# Altium PCB PCB - 100x100 - 85x85.PcbDoc
Units mil, origin at the board's own origin, x right, y up, seen from the top; angles counter-clockwise.
Board outline 1820 x 600 mil, 2 copper layers (Top Layer, Bottom Layer); 14 components, 12 nets, 56 pads, 0 vias.
Unrouted connection lines stored in the file: 2.
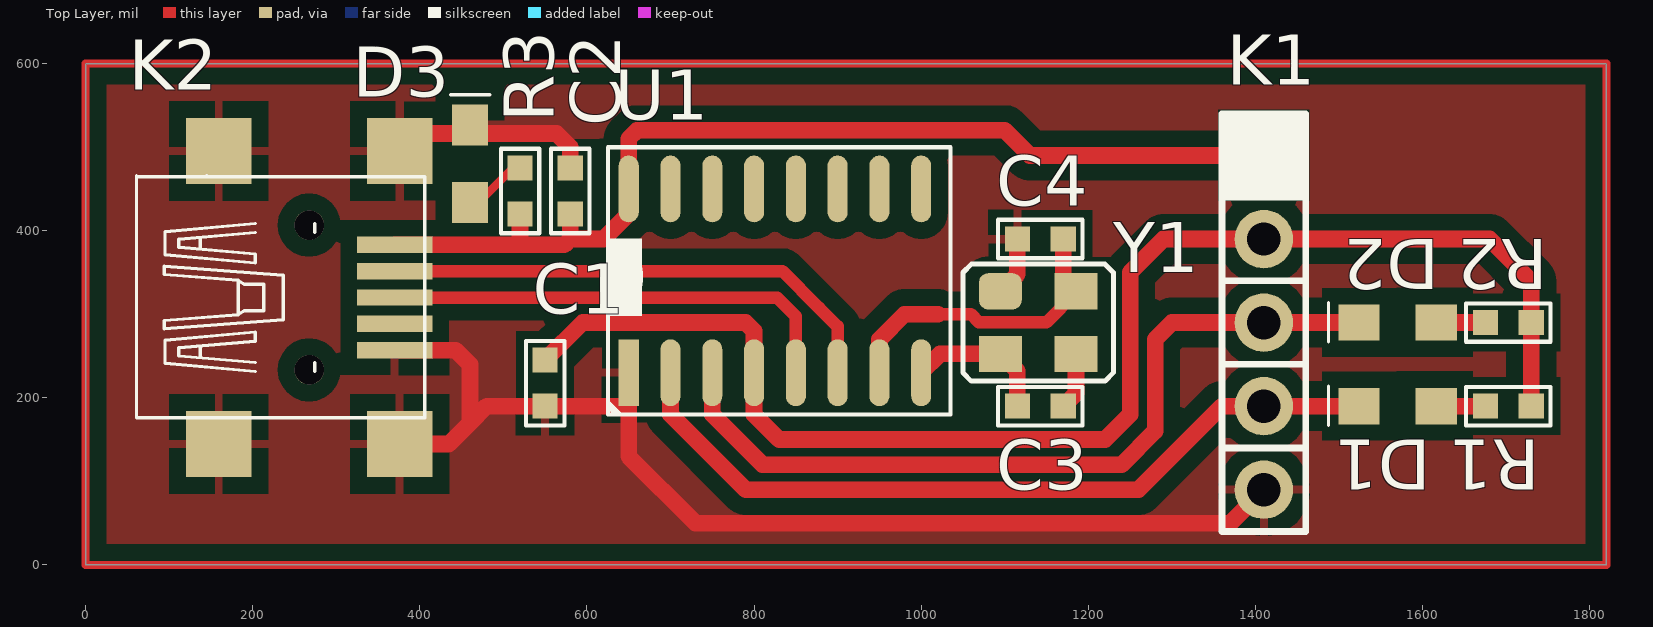
[diagram p0: Top Layer view]
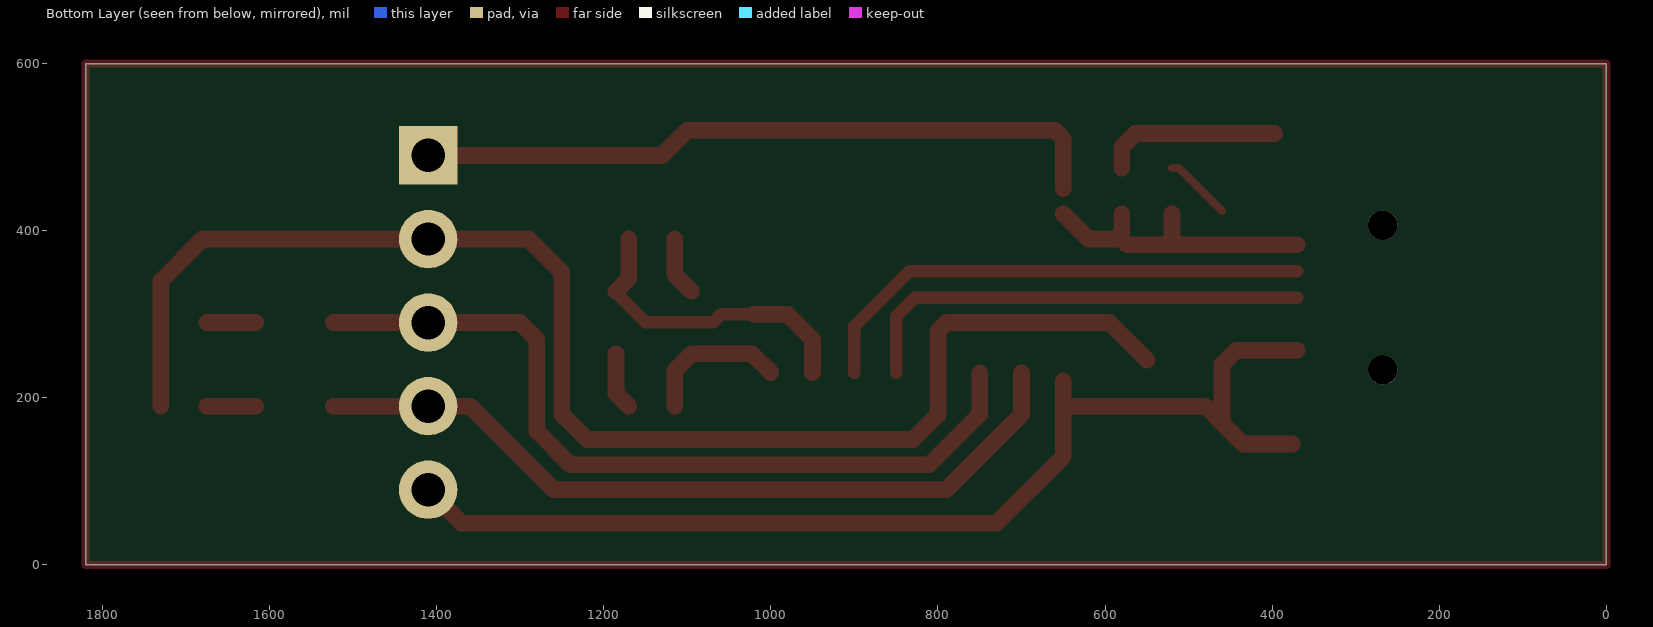
[diagram p1: Bottom Layer view, seen from below]

## Layer stack, top to bottom
Top Solder: solder mask 0.4, Solder Resist, Dk 3.5
Top Layer: signal copper 1.4
Dielectric1: dielectric 12.6, FR-4, Dk 4.8
Bottom Layer: signal copper 1.4
Bottom Solder: solder mask 0.4, Solder Resist, Dk 3.5

## Board outline
0,0 0,600 1820,600 1820,0

## Design rules (kind name [scope] priority, off if disabled: settings)
Clearance Clearance_2 [(InComponent('U2') OR InComponent('C8'))] p1: gap=6
Clearance Clearance_1 [InPolygon] p2: gap=20
Clearance [All] p3: gap=8
DiffPairsRouting [All] p1: maxlimit=10 minlimit=10 mostfreqgap=10 toplayer_minwidth=15 toplayer_maxwidth=15 toplayer_prefwidth=15 bottomlayer_minwidth=15 bottomlayer_maxwidth=15 bottomlayer_prefwidth=15 maxuncoupledlength=500
MinimumSolderMaskSliver [All] p1: minsoldermaskwidth=1
PlaneConnect [All] p1: planeconnectstyle=Relief reliefexpansion=20 reliefentries=4 reliefconductorwidth=10 reliefairgap=20
PolygonConnect [All] p1: connectstyle=Relief reliefconductorwidth=10 reliefentries=4 polygonreliefangle="90 Angle" airgapwidth=20
RoutingVias [All] p1: holewidth=28 width=50 viastyle="Through Hole" minholewidth=28 minwidth=50 maxholewidth=28 maxwidth=50
SilkToSilkClearance [All] p1: silktosilkclearance=0
SilkToSolderMaskClearance [IsPad] p1: minsilkscreentomaskgap=0 clearancetoexposedcopper=TRUE
SolderMaskExpansion [All] p1: expansion=4
Width [All] p1: maxlimit=100 minlimit=10 preferedwidth=20
25 further rules are at their usual default settings.

## Classes and differential pairs
differential pair USB: +USB_P -USB_N

## Components (designator, comment, footprint, x,y, rotation, side; value= is the part's Value field where it differs from the comment)
C1 "100nF" 0603C-GENERIC 550,190 r90 top
C2 "100nF" 0603C-GENERIC 580,475 r270 top
C3 "22pF" 0603C-GENERIC 1170,190 r180 top
C4 "22pF" 0603C-GENERIC 1170,390 r180 top
D1 "TX" 0805LED 1570,190 r180 top
D2 "RX" 0805LED 1570,290 r180 top
D3 "PWR" 0805LED 460,480 r90 top
K1 "Connector_Headers_THT_1X5" HEADER-1X5 1410,490 r0 top
K2 "Connector_USB_SMD_USB_F_MINI" USB_F_MINI 370,320 r0 top
R1 "0603R-1K5" 0603R-1k5 1730,190 r180 top
R2 "0603R-1K5" 0603R-1k5 1730,290 r180 top
R3 "0603R-1K5" 0603R-1k5 520,420 r90 top
U1 "CH340G" SO16 650,230 r90 top
Y1 "3225" "XTAL 3225" 1140,290 r0 top

## Footprints (in the part's own frame and the unit in brackets; to place one, negate y for a bottom-side part, rotate by r counter-clockwise, add the part's x,y. Pads: shape width x height; smd on the part's side, far side on the other; paste and mask are expansions set on the pad)
0603C-GENERIC [mil] "CAPACITOR 0603"
  rect 30x30 smd: 1(0,0) 2(55,0)
  silkscreen extent -23,-23 78,23, body extent -4,-15 59,15, height 19
0603R-1k5 [mil] "RESISTOR 0603"
  rect 30x30 smd: 1(0,0) 2(55,0)
  silkscreen extent -23,-23 78,23, body extent -4,-15 59,15, height 20
0805LED [mm]
  rect 1.25x1.1 smd: A(-1.175,0) K(1.175,0)
  silkscreen extent 2.1,-0.6 2.1,0.59
HEADER-1X5 [mil]
  rect 70x70 hole 40: 1(0,0)
  round 70 hole 40: 2(0,-100) 3(0,-200) 4(0,-300) 5(0,-400)
  silkscreen extent -50,-450 50,50, body extent -50,-450 50,50, height 470
SO16 [mil]
  rect 80x24 smd: 1(0,0)
  oval 80x24 smd: 2(0,-50) 3(0,-100) 4(0,-150) 5(0,-200) 6(0,-250) 7(0,-300) 8(0,-350) 9(220,-350) 10(220,-300) 11(220,-250) 12(220,-200) 13(220,-150) 14(220,-100) 15(220,-50) 16(220,0)
  silkscreen extent -50,-385 270,25, body extent -20,-385 240,25, height 61
USB_F_MINI [mm]
  round 0.9 hole 0.9 unplated: 0(-2.6,-2.2) 0(-2.6,2.2)
  rect 2.3x0.5 smd: 1(0,1.6) 2(0,0.8) 3(0,0) 4(0,-0.8) 5(0,-1.6)
  rect 2x2 smd: M1(-5.35,4.45) M2(0.15,4.45) M3(-5.35,-4.45) M4(0.15,-4.45)
  silkscreen extent -7.85,-3.65 0.91,3.7, body extent -8.35,-4.95 1.05,4.95, height 3.95
"XTAL 3225" [mm] "3225 Quartz"
  rrect50% 1.3x1.1 smd: 1(-1.15,0.95)
  rect 1.3x1.1 smd: 2(1.15,0.95) 3(1.15,-0.95) 4(-1.15,-0.95)
  silkscreen extent -2.29,-1.78 2.29,1.78, body extent -2.4,-1.6 2.6,1.6, height 1

## Part data
C1 C2: library part Passives_Capacitors_0603_GENERIC, "CAPACITOR 0603 CERAMIC GENERIC"
C3 C4: library part Passives_Capacitors_0603_22PF-50V-C0G-PAN, "CAPACITOR 0603 CERAMIC"
D1 D2 D3: library part LED_SMD_0805
K1: "PINHEADER 1X5"
K2: "MINI USB B FEMALE"
R1 R2 R3: "GENERIC RESISTOR 0603"
Y1: library part "3225 Quartz"

## Nets (pads, with @x,y where several pads share a name; then routed paths per layer and width w, separated by ;. In a path a pad name is that pad's centre, name@x,y a point inside that pad or via, vN(x,y) a via of type N, cw(c..) or ccw(c..) an arc to the next point about the centre after c; other vN are vias at no path point)
3V3: C1.2 K1.2 R1.1 R2.1 U1.4 | length 1684.9
  Top Layer w20: C1.2 595,290 790,290 800,280 U1.4 800,180 830,150 1220,150 1250,180 1250,350 1290,390 K1.2 1680,390 1730,340 R2.1 R1.1
5V0: C2.2 K1.1 K2.1 R3.1 U1.16 | length 1198.9
  Top Layer w20: K2.1 520,382.99 ; R3.1 520,382.99 ; C2.2 580,390 ; U1.16@650,420 620,390 580,390 ; U1.16 650,510 660,520 1100,520 1130,490 K1.1 ; 520,382.99 572.99,382.99 580,390
GND: C1.1 C2.1 C3.1 C4.2 D3.K K1.5 K2.5 K2.M1 K2.M2 K2.M3 K2.M4 U1.1 Y1.1 Y1.3 | length 1714.3
  Top Layer w20: K2.5 442.99,257.01 460,240 460,170 ; K2.M4 434.8,144.8 460,170 ; K2.M2@396.97,516.26 563.74,516.26 580,500 C2.1 ; U1.1@650,190 480,190 460,170 ; U1.1@650,220 650,130 730,50 1370,50 K1.5 ; Y1.1 1115,347.68 C4.2 ; C3.1 1185.28,205.28 Y1.3
NetD1_A: D1.A R1.2 | length 58.7
  Top Layer w20: D1.A R1.2
NetD2_A: D2.A R2.2 | length 58.7
  Top Layer w20: D2.A R2.2
NetD3_A: D3.A R3.2 | length 81.2
  Top Layer w10: D3.A@460,423.74 511.26,475 R3.2
RX: D2.K K1.3 U1.3 | length 983.4
  Top Layer w20: U1.3 750,180 810,120 1240,120 1280,160 1280,270 1300,290 K1.3 D2.K
TX: D1.K K1.4 U1.2 | length 952.4
  Top Layer w20: U1.2 700,180 790,90 1260,90 1360,190 K1.4 D1.K
USB_N: K2.2 U1.6 | length 612.8
  Top Layer w15: K2.2 833.86,351.5 877.68,307.68 900,285.36 U1.6
USB_P: K2.3 U1.5 | length 556.8
  Top Layer w15: K2.3 827.5,320 850,297.5 U1.5
Y_IN: C4.1 U1.7 Y1.2 | length 377
  Top Layer w15: 1020,300 1059.3,300 1069.06,290.25 1149.75,290.25 1185.28,325.77 Y1.2
  Top Layer w20: U1.7 950,270 980,300 1020,300 ; C4.1 1170,342.68 Y1.2
Y_OUT: C3.2 U1.8 Y1.4 | length 175.1
  Top Layer w20: U1.8 1022.6,252.6 Y1.4 1115,232.32 C3.2
pads on no net: K2.0 K2.4 U1.9 U1.10 U1.11 U1.12 U1.13 U1.14 U1.15
copper on no net: | length 4840
  Top Layer w10: 0,0 0,600 1820,600 1820,0 0,0

## Polygon pours and split planes (outlines as drawn)
GND on Top Layer "Top Layer-No Net" (solid, pour order 2): 0,600 1820,600 1820,0 0,0